# Altium PCB EST_MainV20.PcbDoc (part 4 of 8)
Units mm, origin at the board's own origin, x right, y up, seen from the top; angles counter-clockwise.
Board outline 69.72 x 115.32 mm, 2 copper layers (Top Layer, Bottom Layer); 330 components, 239 nets, 1066 pads, 416 vias.
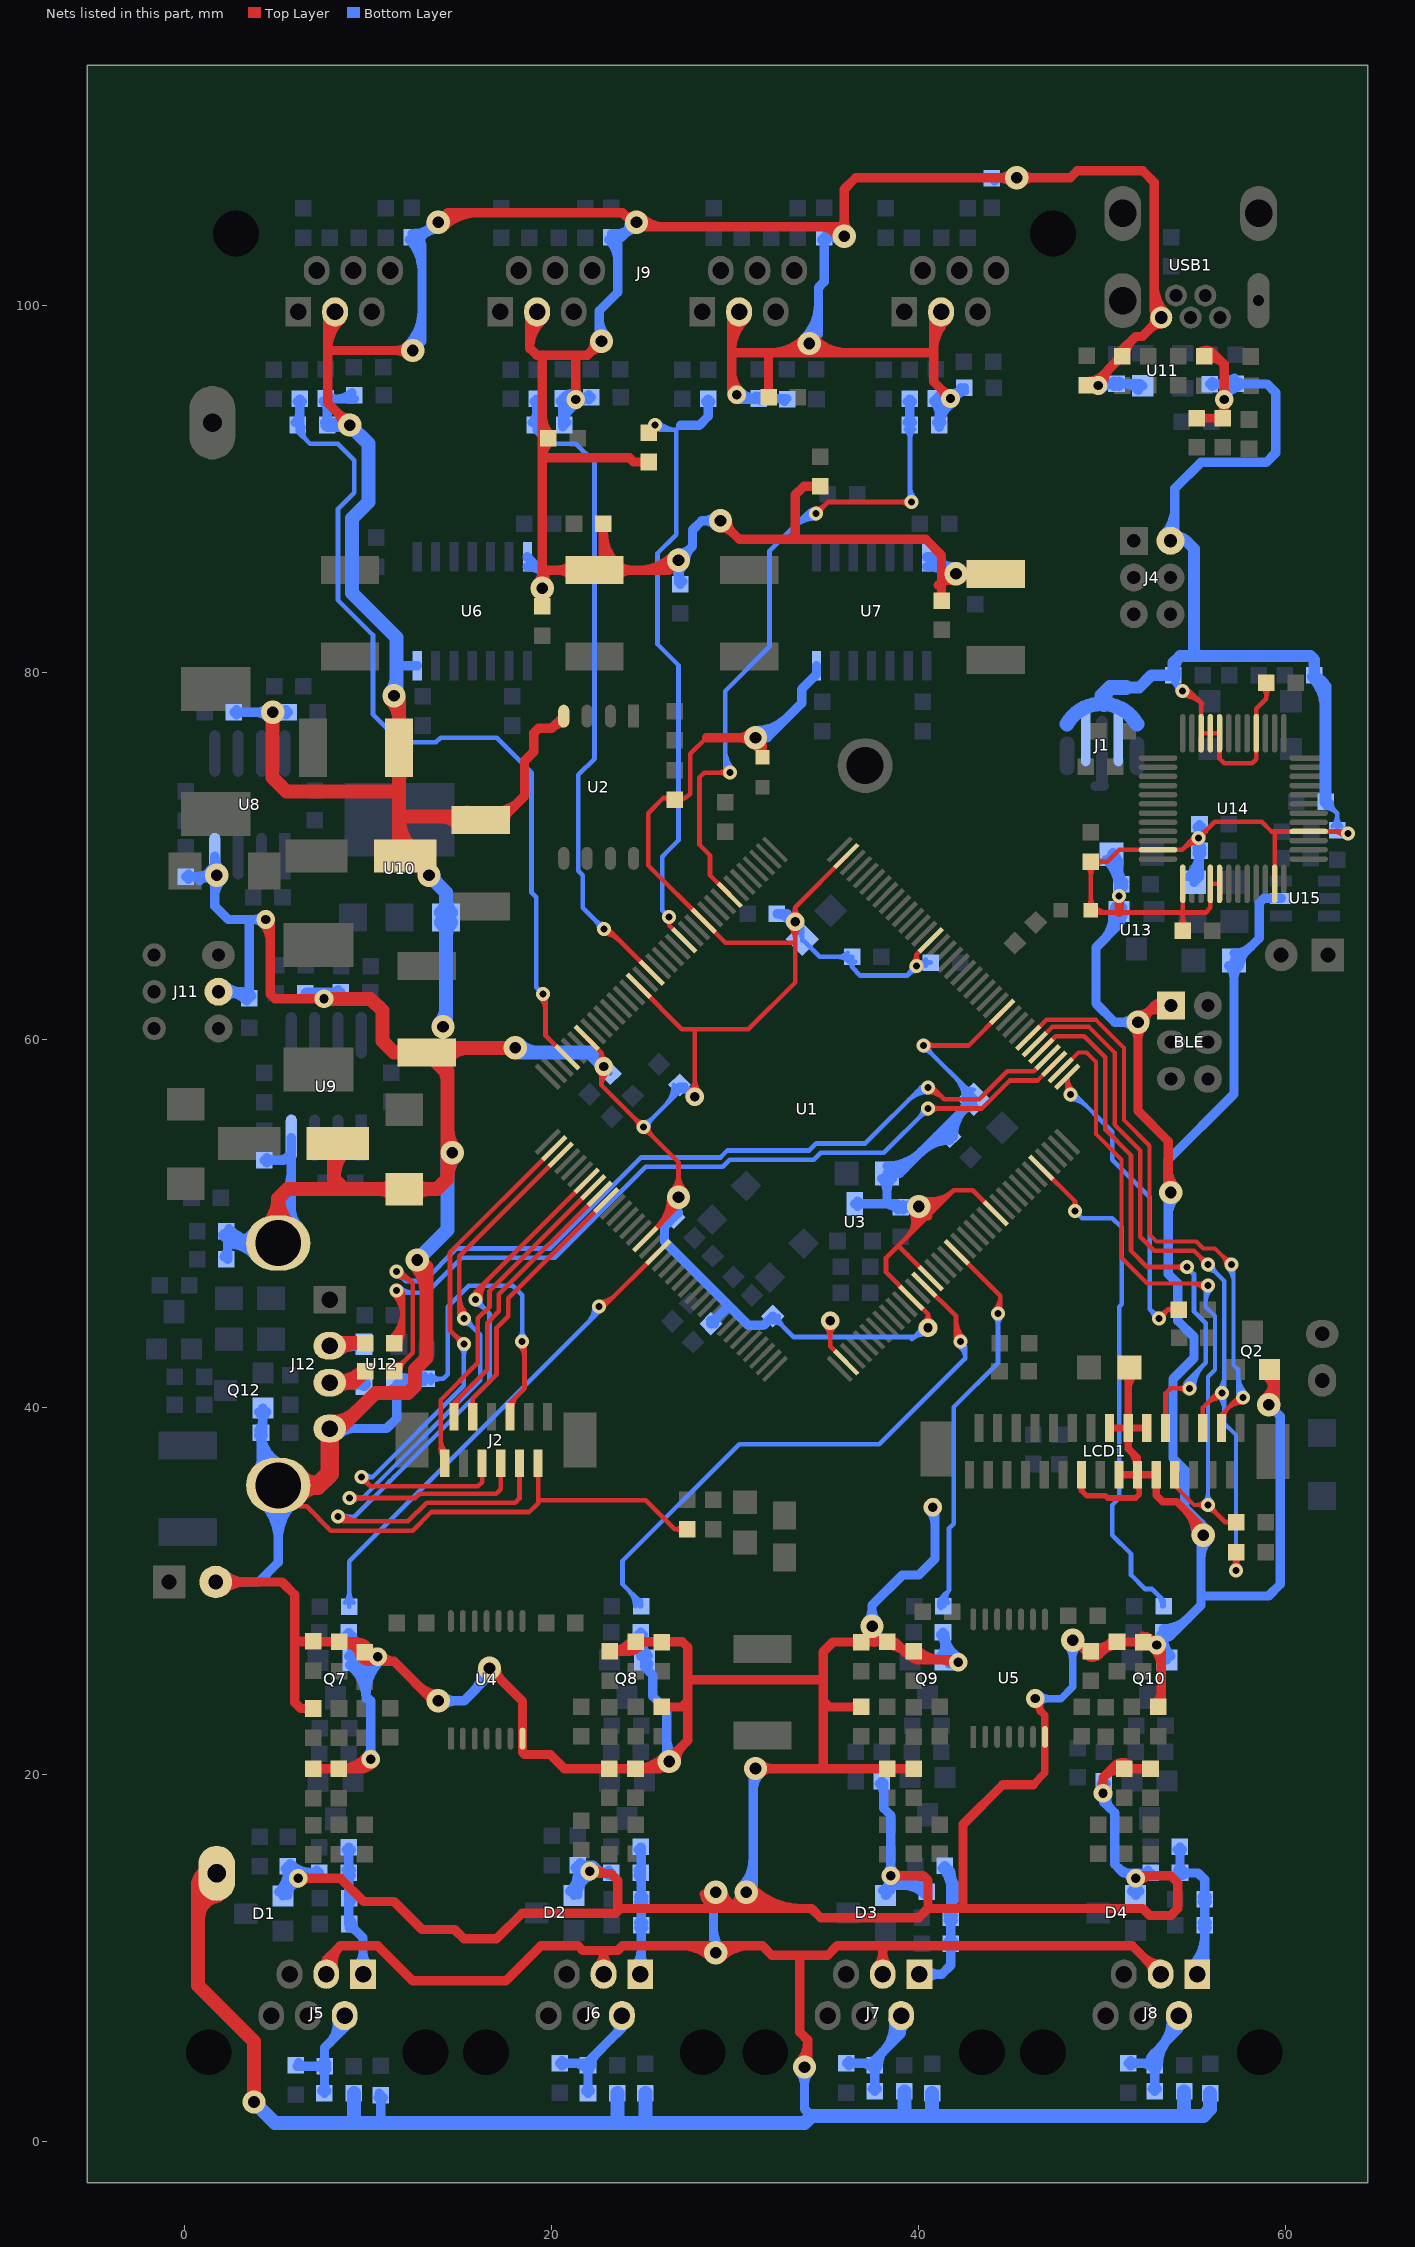
[diagram p4: the nets of this part, all layers, seen from the top]

## Via types
v1: diameter 0.762, hole 0.381, Top Layer to Bottom Layer, 258 vias
v2: diameter 1.27, hole 0.635, Top Layer to Bottom Layer, 91 vias
v3: diameter 1.016, hole 0.508, Top Layer to Bottom Layer, 66 vias
v4: diameter 1.524, hole 0.635, Top Layer to Bottom Layer, 1 vias

## Nets (pads, with @x,y where several pads share a name; then routed paths per layer and width w, separated by ;. In a path a pad name is that pad's centre, name@x,y a point inside that pad or via, vN(x,y) a via of type N, cw(c..) or ccw(c..) an arc to the next point about the centre after c; other vN are vias at no path point) (continued)
GND: (continued)
  Bottom Layer w0.508: R141.2@0.102,68.885 1.067,68.885 ; R141.2@0.241,68.746 cw(c0.575,68.412) 0.575,68.885 cw(c0.575,69.358) R141.2@0.241,69.024 ; 0.675,68.885 ccw(c0.675,70.064) U8.4@1.509,69.23 ; 0.838,68.656 cw(c1.637,67.858) U8.4@1.675,68.986 ; 1.042,68.885 cw(c1.042,68.225) 1.509,68.692 cw(c1.103,68.286) 1.676,68.286 ; 1.143,68.809 1.067,68.885 ; U8.4@1.666,69.484 cw(c1.691,69.459) U8.4@1.692,69.494 ; 1.676,67.796 cw(c2.943,67.796) v2@2.047,68.692 ; J10.2@1.727,30.48 4.064,30.48 5.13,31.546 J12.6@5.13,35.735 4.191,36.674 R160.1@4.191,38.608 ; J11.2@1.874,62.618 3.193,62.618 C69.1@3.552,62.258 3.552,66.425 ; R159.1@2.091,49.36 ccw(c3.213,50.482) 3.213,48.895 ; R158.1@2.173,48.195 ccw(c1.654,48.714) 2.388,48.714 ; J10.2@2.176,30.031 cw(c3.26,28.947) 3.26,30.48 cw(c3.26,32.013) J10.2@2.176,30.929 ; J11.2@2.212,62.618 cw(c2.212,60.918) C69.1@3.413,62.12 ; J11.2@2.234,62.258 cw(c3.101,61.391) 3.101,62.618 cw(c3.101,63.844) J11.2@2.234,62.977 ; R158.1@2.388,48.056 2.388,48.895 ; R159.1@2.388,49.58 2.388,48.895 ; R159.1@2.45,49.719 ccw(c4.439,51.708) J12.5@4.439,48.895 ; R139.1@2.718,77.825 2.722,77.83 v2(4.826,77.83) C57.2@5.693,77.83 ; R139.1@2.856,77.687 cw(c3.202,77.341) 3.202,77.83 ; R139.1@2.856,77.964 ccw(c3.18,78.288) 3.18,77.83 ; 3.372,48.895 ccw(c3.372,50.007) J12.5@4.279,49.362 ; C69.1@3.413,62.397 ccw(c3.079,62.732) 3.552,62.732 ccw(c4.025,62.732) C69.1@3.691,62.397 ; J12.5@3.865,49.657 cw(c2.388,50.707) 2.388,48.895 ; J12.5@3.903,48.162 ccw(c2.388,46.963) 2.388,48.895 ; J12.6@3.999,36.616 ccw(c3.535,37.079) 4.191,37.079 ; R160.1@4.052,38.47 cw(c3.718,38.135) 4.191,38.135 cw(c4.664,38.135) R160.1@4.33,38.47 ; R160.1@4.052,38.747 ccw(c3.473,39.327) 4.293,39.327 ; Q12.1@4.068,39.73 cw(c3.526,39.188) 4.293,39.188 cw(c5.059,39.188) Q12.1@4.517,39.73 ; 4.191,37.099 ccw(c5.434,37.099) J12.6@4.966,35.948 ; 4.191,37.854 ccw(c5.74,37.854) J12.6@5.158,36.419 ; J12.6@4.249,34.854 cw(c2.122,32.727) 5.13,32.727 cw(c8.138,32.727) J12.6@6.011,34.854 ; v3@4.265,66.368 ccw(c3.832,65.935) 3.832,66.548 ccw(c3.832,67.161) v3@4.265,66.728 ; Q12.1@4.293,39.954 4.293,38.71 R160.1@4.191,38.608 ; R142.2@4.369,53.442 5.436,53.442 5.842,53.848 U9.4@5.842,54.661 5.842,49.647 J12.5@5.13,48.935 5.09,48.895 2.388,48.895 ; v3@4.445,66.429 v3(4.445,66.548) 2.413,66.548 1.676,67.285 U8.4@1.676,70.002 ; J12.5@4.499,49.816 ccw(c1.256,53.058) 5.842,53.058 ; R142.2@4.508,53.303 cw(c4.842,52.969) 4.842,53.442 cw(c4.842,53.915) R142.2@4.508,53.58 ; v2@4.557,77.56 ccw(c3.906,76.91) 3.906,77.83 ccw(c3.906,78.749) v2@4.557,78.099 ; J12.6@4.608,35.213 cw(c3.348,33.953) 5.13,33.953 cw(c6.912,33.953) J12.6@5.652,35.213 ; J12.5@4.858,49.457 ccw(c2.483,51.832) 5.842,51.832 ; 5.107,53.442 ccw(c5.107,54.431) U9.4@5.806,53.732 ; v2@5.107,77.572 cw(c5.693,77.034) C57.2@5.693,77.83 ; v2@5.107,78.087 ccw(c5.693,78.625) C57.2@5.693,77.83 ; D1.1@5.165,13.603 ccw(c4.011,14.757) R45.1@5.644,14.757 ; J12.5@5.217,49.097 ccw(c3.709,50.605) 5.842,50.605 ; J12.6@5.349,36.889 cw(c6.046,38.608) R160.1@4.191,38.608 ; D1.1@5.39,13.379 5.644,13.632 R45.1@5.644,15.004 ; R45.1@5.505,14.866 cw(c5.17,14.531) 5.644,14.531 cw(c6.117,14.531) R45.1@5.782,14.866 ; C57.2@5.554,77.691 ccw(c5.22,77.356) 5.22,77.83 ccw(c5.22,78.303) C57.2@5.554,77.968 ; D1.1@5.644,13.428 cw(c6.318,13.428) v3@6.249,14.098 ; 5.644,13.991 cw(c6.26,13.991) v3@6.197,14.604 ; R45.1@5.782,15.143 ccw(c6.966,16.326) C15.2@6.966,14.653 ; 5.842,50.827 ccw(c7.273,50.827) J12.5@6.261,49.816 ; R45.1@5.995,14.653 C15.2@7.374,14.653 ccw(c7.374,13.436) v3@6.422,14.193 ; R140.1@6.604,62.534 R140.1@6.659,62.59 ; R140.1@6.743,62.396 cw(c7.21,61.928) 7.21,62.59 ; R140.1@6.909,62.534 R140.1@6.913,62.539 ; C15.2@7.236,14.514 ccw(c6.901,14.179) 6.901,14.653 ccw(c6.901,15.126) C15.2@7.236,14.791 ; v3@7.39,62.123 ccw(c6.659,61.785) R140.1@6.659,62.59 ; R102.1@7.583,94.781 cw(c7.056,94.254) 7.801,94.254 ; v3(7.62,62.23) v3@7.62,62.59 ; C41.1@7.662,93.615 ccw(c7.328,93.949) 7.801,93.949 ccw(c8.274,93.949) C41.1@7.939,93.615 ; C41.1@7.801,93.476 7.801,94.84 7.751,94.89 C43.1@9.268,94.89 ; v3@7.855,62.133 cw(c8.538,61.851) C58.2@8.538,62.59 v3@7.62,62.59 ; R102.1@7.86,95.058 ccw(c8.265,95.464) 8.265,94.89 ; J12.4@7.93,38.835 11.022,38.835 11.582,39.395 U12.1@11.582,41.25 11.872,41.539 C68.2@13.204,41.539 ; 8.304,94.89 ccw(c8.304,96.057) C43.1@9.129,95.232 ; C58.2@8.399,62.451 ccw(c8.064,62.116) 8.064,62.59 ccw(c8.064,63.063) C58.2@8.399,62.728 ; J12.4@8.42,38.484 cw(c9.266,37.637) 9.266,38.835 cw(c9.266,40.032) J12.4@8.42,39.185 ; R41.1@8.833,27.591 cw(c7.946,26.704) Q7.1@9.2,26.704 ; R41.1@8.971,27.729 9.2,27.501 Q7.1@9.2,26.206 9.906,26.206 ; Q7.1@8.975,26.43 ccw(c8.433,26.972) 9.2,26.972 ccw(c9.966,26.972) 9.424,26.43 ccw(c9.966,26.972) 9.966,26.206 ccw(c9.966,25.439) Q7.1@9.424,25.981 ; Q7.1@9.007,25.954 cw(c7.613,24.133) 9.906,24.133 ; Q7.1@9.316,26.357 cw(c8.401,25.162) 9.906,25.162 ; Q7.1@9.42,26.206 ccw(c9.42,27.537) 10.361,26.596 ccw(c11.461,25.496) 9.906,25.496 ; Q7.1@9.625,26.76 cw(c9.188,26.19) 9.906,26.19 ; 9.906,24.27 cw(c12.687,24.27) v3@10.721,26.236 ; v3@9.98,21.008 ccw(c9.547,21.441) 10.16,21.441 ccw(c10.773,21.441) v3@10.34,21.008 ; v3(10.16,20.828) 10.16,24.003 9.906,24.257 9.906,26.206 ; C19.2@10.581,2.397 cw(c10.247,2.063) 10.72,2.063 cw(c11.193,2.063) C19.2@10.859,2.397 ; C19.2@10.614,2.642 C19.2@10.72,2.536 10.72,1.778 ; 10.668,1.016 10.72,1.068 10.72,1.778 ; 10.72,1.472 10.72,1.778 ; v3@10.751,26.206 9.906,26.206 ; U12.1@11.349,41.016 cw(c10.785,40.452) 11.582,40.452 cw(c12.38,40.452) 11.816,41.016 cw(c13.078,39.754) C68.2@13.078,41.539 ; 11.557,80.391 11.582,80.366 U6.7@12.694,80.366 ; v2@12.177,97.805 ccw(c10.3,99.682) 12.954,99.682 ; C45.1@12.261,103.567 cw(c10.587,101.893) 12.954,101.893 ; C45.1@12.391,103.509 cw(c12.365,102.921) 12.954,102.921 ; C45.1@12.399,103.509 cw(c12.399,103.036) 12.734,103.371 cw(c13.068,103.705) C45.1@12.595,103.705 ; C45.1@12.42,103.9 ccw(c12.558,105.171) 13.462,104.267 12.9,103.705 12.9,103.204 12.954,103.15 12.954,98.044 v2(12.446,97.536) ; v2@12.536,97.446 ccw(c11.526,98.456) 12.954,98.456 ; C45.1@12.62,103.926 cw(c11.813,103.119) 12.954,103.119 ; 12.976,103.781 cw(c13.843,102.914) v2@13.843,104.14 ; C68.2@13.065,41.4 ccw(c12.731,41.066) 12.731,41.539 ccw(c12.731,42.012) C68.2@13.065,41.678 ; 13.282,104.087 ccw(c12.849,104.521) v2@13.462,104.521 ; v2(13.843,24.003) 15.24,24.003 16.637,25.4 v2(16.637,25.781) ; v2@14.112,23.734 cw(c14.763,23.083) 14.763,24.003 cw(c14.763,24.923) v2@14.112,24.272 ; 15.717,24.48 ccw(c14.416,25.781) v2@16.256,25.781 ; U6.14@18.694,85.76 cw(c18.694,84.441) 19.626,85.374 ; U6.14@18.694,86.268 cw(c18.694,86.176) U6.14@18.759,86.241 ; U6.14@18.694,86.306 19.507,85.493 ; v2@19.238,84.855 ccw(c18.618,85.493) 19.507,85.493 ; v2(19.503,84.582) 19.507,84.586 19.507,85.493 ; 19.507,85.492 ccw(c20.413,85.492) v2@19.773,84.851 ; R104.1@20.486,94.781 cw(c20.151,94.447) 20.624,94.447 cw(c21.098,94.447) 20.763,94.781 cw(c21.272,94.272) v3@21.272,94.992 ; C42.1@20.624,93.375 cw(c22.009,93.375) v3@21.44,94.637 ; 20.624,94.141 ccw(c21.369,94.141) C42.1@20.843,93.615 ; 20.624,94.161 cw(c21.655,94.161) v3@21.232,95.101 ; R104.1@20.699,94.994 cw(c21.142,94.552) v3@21.469,95.086 ; C42.1@20.704,93.476 20.624,93.556 R104.1@20.624,94.92 R104.1@20.697,94.992 ; R104.1@20.725,95.02 cw(c21.136,94.609) v3@21.491,95.07 ; D2.1@21.01,13.636 ccw(c19.978,14.667) R46.1@21.437,14.667 ; v3@21.114,94.746 ccw(c20.697,94.515) R104.1@20.697,94.992 ; D2.1@21.234,13.411 21.437,13.614 R46.1@21.437,15.062 ; R46.1@21.299,14.924 cw(c20.964,14.589) 21.437,14.589 cw(c21.91,14.589) 21.576,14.924 cw(c21.91,14.589) 21.91,15.062 cw(c21.91,15.535) R46.1@21.576,15.201 ; D2.1@21.437,13.433 cw(c22.562,13.433) v3@22.184,14.493 ; 21.437,14.155 cw(c22.305,14.155) v3@22.012,14.971 ; v3@21.527,94.701 cw(c22.171,94.132) C44.1@22.171,94.992 R104.1@20.697,94.992 ; R46.1@21.846,14.701 ccw(c21.437,14.65) R46.1@21.437,15.062 ; C44.1@22.033,94.853 ccw(c21.698,94.519) 21.698,94.992 ccw(c21.698,95.465) C44.1@22.033,95.131 ; v3@22.278,14.912 ccw(c22.947,15.581) C16.2@22.947,14.634 ; v3@22.559,14.779 ccw(c22.848,15.068) C16.2@23.133,14.775 ; v2@22.606,98.171 22.606,99.695 23.622,100.711 C46.1@23.622,103.354 ; 22.606,99.27 ccw(c23.959,99.27) v2@23.002,98.313 ; C16.2@23.131,14.496 ccw(c22.796,14.161) 22.796,14.634 ccw(c22.796,15.108) C16.2@23.131,14.773 ; C46.1@23.132,103.567 cw(c21.948,102.383) 23.622,102.383 ; C16.2@23.27,14.634 22.704,14.634 22.276,15.062 R46.1@21.437,15.062 ; C46.1@23.27,103.705 23.822,103.705 24.384,104.267 cw(c23.469,105.182) C46.1@23.296,103.899 ; v2@24.257,104.521 cw(c23.337,104.521) 23.988,103.871 cw(c24.638,103.22) v2@24.638,104.14 ; R42.1@24.728,27.598 cw(c24.393,27.263) 24.867,27.263 cw(c25.34,27.263) R42.1@25.005,27.598 ; Q8.1@24.867,26.441 R42.1@24.867,27.736 ; R42.1@24.867,27.495 ccw(c26.327,27.495) Q8.1@25.294,26.463 ; Q8.1@25.07,26.238 25.07,25.857 25.527,25.4 25.527,24.257 26.289,23.495 26.289,21.209 v2@26.543,20.955 ; Q8.1@25.315,26.036 ccw(c25.571,25.825) 25.336,25.591 ; 26.289,21.927 ccw(c27.642,21.927) v2@26.685,20.97 ; v2@26.655,85.837 cw(c26.004,85.186) 26.924,85.186 cw(c27.844,85.186) v2@27.193,85.837 ; C6.1@26.924,50.597 C6.1@26.667,50.34 26.162,49.835 26.162,49.022 30.734,44.45 31.547,44.45 C7.1@32.058,44.961 ; v2@26.924,85.522 ccw(c27.73,85.522) C40.1@27.16,84.952 ; v2@26.924,86.487 ccw(c26.924,87.407) 27.574,86.756 ccw(c28.225,86.106) v2@27.305,86.106 ; C40.1@27.022,84.814 26.924,84.911 v2(26.924,86.106) 27.686,86.868 27.686,87.757 28.194,88.265 v2(29.21,88.265) ; C8.1@28.686,44.537 29.644,45.495 ; C8.1@28.686,44.733 ccw(c28.686,45.206) 29.021,44.872 ccw(c29.355,44.537) C8.1@28.882,44.537 ; v2@28.829,10.287 v2@28.829,13.589 ; 28.829,11.513 ccw(c30.182,11.513) v2@29.225,10.556 ; 28.829,12.363 cw(c30.182,12.363) v2@29.225,13.32 ; v2@28.941,87.996 ccw(c28.29,87.345) 28.29,88.265 ccw(c28.29,89.185) v2@28.941,88.534 ; v3@30.099,94.869 31.292,94.869 cw(c31.292,96.271) v3@30.282,95.299 ; v2@30.338,13.858 ccw(c28.767,15.429) 30.988,15.429 ; v2(30.607,13.589) 30.988,13.97 v2@30.988,19.939 ; 30.697,94.869 ccw(c30.697,95.516) R120.1@31.154,95.058 ; v2@30.697,13.499 ccw(c29.994,14.202) 30.988,14.202 ; 30.988,19.094 cw(c32.341,19.094) v2@31.384,20.051 ; v2@31.115,76.327 ccw(c31.115,77.553) 31.982,76.686 ; v2(31.115,76.454) 31.75,76.454 33.63,78.334 33.63,79.096 34.437,79.903 U7.7@34.437,80.366 ; v2@31.115,76.835 ccw(c31.115,79.288) 32.849,77.553 ; R120.1@31.292,94.92 C51.1@32.81,94.92 ; R120.1@31.431,94.781 cw(c31.766,94.447) 31.766,94.92 cw(c31.766,95.393) R120.1@31.431,95.058 ; 32.295,94.92 cw(c32.295,94.346) C51.1@32.701,94.752 ; v3@33.036,66.334 ccw(c32.286,66.059) C61.1@32.286,66.857 32.838,66.857 v3(33.274,66.421) ; v2@33.513,3.795 cw(c32.862,3.144) 33.782,3.144 cw(c34.702,3.144) v2@34.051,3.795 ; v2@33.767,98.186 ccw(c31.89,100.063) 34.544,100.063 ; v2@33.782,3.81 33.782,1.778 34.163,1.397 ; v2(34.036,97.917) 34.544,98.425 34.544,100.965 34.853,101.274 C53.1@34.853,103.705 ; v2@34.126,97.827 ccw(c33.116,98.837) 34.544,98.837 ; C53.1@34.714,103.567 cw(c34.38,103.232) 34.853,103.232 cw(c35.326,103.232) 34.991,103.567 cw(c35.456,103.102) v2@35.456,103.759 ; C53.1@34.907,103.759 v2(35.941,103.759) ; v2@35.672,103.49 ccw(c35.021,102.839) 35.021,103.759 ccw(c35.021,104.679) v2@35.672,104.028 ; U3.2@36.525,51.079 38.354,51.079 ; U3.2@36.669,50.936 cw(c37.016,50.589) 37.016,51.079 cw(c37.016,51.57) U3.2@36.669,51.223 ; v2@37.196,28.336 ccw(c36.545,28.987) 37.465,28.987 ccw(c38.385,28.987) v2@37.734,28.336 ; v2(37.465,28.067) v2@37.465,28.321 ; v2@37.592,28.194 v2@37.465,28.321 ; R47.1@37.859,19.496 cw(c37.279,18.915) 38.1,18.915 ; C12.1@37.996,52.449 cw(c37.32,51.773) 38.276,51.773 cw(c39.232,51.773) C12.1@38.556,52.449 ; R47.1@37.998,19.634 38.1,19.532 38.1,18.161 38.481,17.78 v3(38.481,14.478) ; D3.1@38.036,13.682 ccw(c37.547,14.478) v3(38.481,14.478) ; 38.051,51.079 cw(c38.051,49.912) R9.1@38.876,50.738 ; D3.1@38.202,13.411 38.481,13.691 v3(38.481,14.478) ; C12.1@38.276,52.617 ccw(c38.276,54.016) 39.266,53.027 ; C12.1@38.276,53.125 ccw(c38.276,55.751) 40.133,53.894 ; v3@38.284,14.317 ccw(c39.017,14.916) 39.017,13.97 ; v3@38.301,14.298 cw(c37.868,13.865) 38.481,13.865 cw(c39.094,13.865) v3@38.661,14.298 ; v3@38.301,14.658 ccw(c37.868,15.091) 38.481,15.091 ccw(c39.094,15.091) v3@38.661,14.658 ; D3.1@38.601,13.97 C17.2@40.088,13.97 ; v3@38.678,14.639 ccw(c40.088,15.792) C17.2@40.088,13.97 ; 39.118,13.97 cw(c39.118,12.296) C17.2@40.301,13.48 ; R9.1@39.153,50.738 cw(c39.488,50.403) 39.488,50.876 cw(c39.488,51.349) R9.1@39.153,51.015 ; R9.1@39.208,50.876 cw(c39.208,50.13) v2@39.736,50.658 ; v2@39.726,51.186 cw(c39.015,51.846) R9.1@39.015,50.876 ; v2@39.954,50.876 R9.1@39.015,50.876 ; 40.118,53.878 cw(c41.696,52.3) C85.2@41.696,54.532 ; C17.2@40.19,13.868 C17.2@40.44,13.618 C17.2@40.088,13.97 ; U7.14@40.437,85.76 cw(c40.437,83.574) v2@41.982,85.12 ; U7.14@40.437,86.268 cw(c40.437,85.309) 41.115,85.987 ; U7.14@40.437,86.306 40.796,86.306 v2@41.732,85.369 ; v3@40.587,34.364 cw(c39.847,33.624) 40.894,33.624 ; R122.1@40.806,94.781 cw(c40.034,94.009) 41.126,94.009 ; v3@40.894,34.798 40.894,31.75 40.005,30.861 39.116,30.861 37.465,29.21 v2@37.465,28.321 ; 40.948,86.153 ccw(c41.929,87.133) v2@42.014,85.75 ; 40.985,54.746 cw(c41.696,54.035) C85.2@41.696,55.04 ; C50.1@40.987,93.615 ccw(c40.652,93.949) 41.126,93.949 ccw(c41.599,93.949) C50.1@41.264,93.615 ; R122.1@41.083,94.781 cw(c41.418,94.447) 41.418,94.92 cw(c41.418,95.393) R122.1@41.083,95.058 ; C50.1@41.126,93.354 cw(c42.727,93.354) v3@41.868,94.705 ; C50.1@41.126,93.476 41.126,94.739 R122.1@40.944,94.92 v3(41.732,94.92) 41.911,94.92 C52.1@42.491,95.5 ; 41.126,94.278 cw(c42.14,94.278) v3@41.596,95.134 ; R43.1@41.187,27.598 cw(c40.607,27.018) 41.427,27.018 ; Q9.1@41.203,26.463 ccw(c40.661,27.005) 41.427,27.005 ccw(c42.194,27.005) 41.652,26.463 ccw(c42.194,27.005) 42.194,26.238 ccw(c42.194,25.472) Q9.1@41.652,26.014 ; R43.1@41.326,27.736 R43.1@41.427,27.635 ; C85.2@41.384,54.728 cw(c42.389,54.728) 41.678,55.439 ; 41.427,26.853 ccw(c42.493,26.853) v3@42.061,25.879 ; v3@41.553,94.74 ccw(c41.119,94.307) 41.119,94.92 ccw(c41.119,95.533) v3@41.553,95.099 ; v3@41.732,95.174 ccw(c41.732,96.219) C52.1@42.471,95.48 ; C85.2@41.892,54.728 cw(c44.124,54.728) C9.2@42.546,56.306 ; Q9.1@41.957,25.964 ccw(c41.427,25.59) Q9.1@41.427,26.238 ; v2(42.037,85.369) 43.027,85.369 C48.1@43.074,85.322 ; v3@42.267,26.343 cw(c42.84,27.635) R43.1@41.427,27.635 ; v3@42.291,26.238 Q9.1@41.427,26.238 ; C52.1@42.295,95.5 cw(c41.822,95.5) 42.157,95.165 cw(c42.491,94.831) C52.1@42.491,95.304 ; v2@42.306,85.1 cw(c42.957,84.45) 42.957,85.369 cw(c42.957,86.289) v2@42.306,85.639 ; v2@42.486,85.369 cw(c42.486,84.733) C48.1@42.936,85.183 ; C9.2@42.608,56.765 cw(c41.652,56.765) 42.328,56.089 cw(c43.004,55.413) C9.2@43.004,56.369 ; C9.2@43.004,56.765 38.968,52.729 C12.1@38.276,52.729 38.276,51.157 38.354,51.079 ; C54.1@44.011,106.934 v2(45.339,106.934) ; C54.1@44.127,106.773 cw(c44.516,106.384) 44.516,106.934 ; v2@45.07,106.665 ccw(c44.419,106.014) 44.419,106.934 ccw(c44.419,107.854) v2@45.07,107.203 ; v3@49.873,19.166 ccw(c49.473,19.634) R48.1@50.088,19.634 50.088,18.492 50.673,17.907 50.673,15.113 51.152,14.634 ; R48.1@49.95,19.496 cw(c49.615,19.161) 50.088,19.161 cw(c50.562,19.161) R48.1@50.227,19.496 ; v3@49.964,95.451 cw(c50.635,94.78) R149.1@50.635,95.73 ; 50.013,65.38 ccw(c48.612,66.78) U13.2@50.585,66.952 ; v3@50.165,95.73 52.073,95.73 U11.1@52.197,95.606 ; C73.2@50.224,69.822 cw(c48.587,68.186) C74.1@50.902,68.186 ; v3@50.278,18.892 ccw(c50.985,18.651) 50.457,18.123 ; 50.294,95.73 ccw(c50.294,96.213) R149.1@50.636,95.871 ; 50.308,95.73 cw(c50.308,95.267) R149.1@50.636,95.594 ; C73.2@50.504,70.102 50.902,69.704 v1(50.902,67.818) U13.2@50.902,66.98 50.902,66.269 ; C73.2@50.583,70.182 cw(c49.813,69.412) 50.902,69.412 ; U13.2@50.677,67.204 ccw(c50.135,67.746) 50.902,67.746 ccw(c51.668,67.746) U13.2@51.126,67.204 ; U13.2@50.69,66.743 cw(c50.264,66.269) 50.902,66.269 ; 50.783,66.15 ccw(c50.03,66.904) U13.2@51.091,66.996 ; 50.865,14.921 ccw(c51.652,15.708) v3@51.788,14.603 ; v1@50.902,67.702 cw(c51.798,67.702) C74.1@51.164,68.336 ; 50.902,69.247 ccw(c51.798,69.247) C74.1@51.164,68.613 ; R149.1@50.913,95.594 cw(c51.24,95.267) 51.24,95.73 ; R149.1@50.913,95.871 ccw(c51.255,96.213) 51.255,95.73 ; R149.1@51.1,95.73 cw(c51.1,94.509) U11.1@51.964,95.372 ; U13.2@51.114,66.743 ccw(c51.539,66.269) 50.902,66.269 ; v3@51.571,14.297 ccw(c51.152,14.205) 51.152,14.634 ; D4.1@51.591,13.636 ccw(c51.042,14.185) v3@51.819,14.185 ; v3@51.64,14.171 cw(c51.206,13.738) 51.819,13.738 cw(c52.432,13.738) v3@51.999,14.171 ; v2@51.674,60.691 ccw(c51.023,60.04) 51.023,60.96 ccw(c51.023,61.88) v2@51.674,61.229 ; D4.1@51.816,13.411 51.819,13.414 v3(51.819,14.351) v3@51.819,14.634 ; v3@51.819,14.17 ccw(c52.575,14.17) D4.1@52.041,13.636 ; v2(51.943,60.96) 50.673,60.96 49.657,61.976 49.657,65.024 50.902,66.269 ; v3@52.053,14.252 cw(c52.632,14.005) C18.2@52.632,14.634 v3@51.819,14.634 ; C18.2@52.493,14.496 ccw(c52.159,14.161) 52.159,14.634 ccw(c52.159,15.108) C18.2@52.493,14.773 ; R44.1@52.929,27.303 ccw(c52.879,27.736) R44.1@53.315,27.736 ; R44.1@53.176,27.598 cw(c52.841,27.263) 53.315,27.263 cw(c53.788,27.263) 53.453,27.598 cw(c53.788,27.263) 53.788,27.736 cw(c53.788,28.21) R44.1@53.453,27.875 ; v3@53.207,26.996 ccw(c53.874,26.848) Q10.1@53.391,26.365 ; R44.1@53.315,27.424 ccw(c53.315,28.081) 53.779,27.617 ; R44.1@53.315,27.495 ccw(c54.775,27.495) Q10.1@53.742,26.463 ; R44.1@53.315,27.932 ccw(c53.315,29.815) 54.646,28.484 ; J4.2@53.355,87.532 ccw(c51.92,88.967) 53.95,88.967 ; Q10.1@53.518,26.238 53.315,26.441 R44.1@53.315,27.736 ; 53.594,50.463 cw(c54.947,50.463) v2@53.99,51.42 ; 53.594,52.915 ccw(c54.947,52.915) v2@53.99,51.958 ; J4.2@53.95,87.173 53.95,90.018 55.372,91.44 56.134,91.44 ; 54.489,34.538 cw(c52.972,33.02) v2@55.118,33.02 ; C72.1@54.712,68.862 ccw(c53.311,70.263) C79.1@55.293,70.263 ; C72.1@54.992,68.582 55.293,68.882 C79.1@55.293,70.303 C80.1@55.293,71.726 ; C79.1@55.154,70.165 cw(c54.82,69.83) 55.293,69.83 cw(c55.766,69.83) C79.1@55.431,70.165 ; C79.1@55.154,70.442 ccw(c54.82,70.776) 55.293,70.776 ccw(c55.766,70.776) C79.1@55.431,70.442 ; C80.1@55.154,71.587 cw(c54.82,71.252) 55.293,71.252 cw(c55.766,71.252) C80.1@55.431,71.587 ; v1@55.155,70.903 cw(c54.823,70.571) C79.1@55.293,70.571 ; v1@55.155,71.083 ccw(c54.823,71.415) C80.1@55.293,71.415 ; 55.357,33.67 cw(c54.706,33.02) v2@55.626,33.02 ; 55.372,31.794 cw(c56.725,31.794) v2@55.768,32.751 ; 55.753,91.44 56.134,91.44 ; R143.2@55.855,95.707 55.858,95.71 56.642,95.71 ; R143.2@55.994,95.569 cw(c56.335,95.227) 56.335,95.71 ; R143.2@55.994,95.846 ccw(c56.321,96.173) 56.321,95.71 ; v3@56.462,95.049 ccw(c56.029,95.482) 56.642,95.482 ccw(c57.255,95.482) v3@56.822,95.049 ; v3@56.642,94.659 cw(c57.528,94.659) C63.2@57.319,95.52 ; v3(56.642,94.869) 56.642,95.71 ; v3@56.642,95.305 cw(c57.371,95.305) C63.2@57.199,96.014 ; C71.1@56.894,64.031 cw(c56.218,63.355) 57.174,63.355 cw(c58.13,63.355) C71.1@57.454,64.031 ; C71.1@57.174,64.707 ccw(c57.174,66.031) 58.11,65.095 ; C63.2@57.412,95.572 cw(c57.746,95.237) 57.746,95.71 cw(c57.746,96.184) C63.2@57.412,95.849 ; C71.1@57.57,64.311 cw(c58.159,64.311) C71.1@57.742,64.727 ; v2(59.055,40.132) 59.69,39.497 59.69,30.353 59.055,29.718 55.372,29.718 ; U15.2@59.741,67.701 58.811,67.701 58.547,67.437 58.547,65.532 57.326,64.311 C71.1@57.174,64.311 57.174,57.829 57.174,57.047 53.594,53.467 53.594,47.244 54.102,46.736 54.102,44.704 54.991,43.815 54.991,42.672 53.848,41.529 53.848,37.211 54.483,36.576 54.483,34.544 55.499,33.528 v2(55.499,33.02) 55.372,32.893 55.372,29.718 ; 1.067,68.885 1.676,69.494 U8.4@1.676,70.002 ; U8.4@1.509,69.23 ccw(c1.103,69.636) 1.676,69.636 cw(c1.103,69.636) U8.4@1.509,69.23 ; U8.4@1.676,70.002 ccw(c2.66,70.002) 2.024,69.252 cw(c2.66,70.002) U8.4@1.676,70.002 ; R159.1@2.173,49.442 cw(c1.654,48.923) 2.388,48.923 ; R159.1@2.173,49.442 cw(c1.654,48.923) 2.388,48.923 ; R159.1@2.173,49.442 cw(c1.654,48.923) 2.388,48.923 ; R140.1@6.659,62.59 v3@7.62,62.59 ; 9.906,26.206 ccw(c9.906,26.618) 10.299,26.493 cw(c9.906,26.618) 9.906,26.206 ; 9.906,26.206 cw(c9.906,26.832) 9.438,26.416 ccw(c9.906,26.832) 9.906,26.206 ; 9.906,26.206 ccw(c9.906,25.58) 9.438,25.995 cw(c9.906,25.58) 9.906,26.206 ; 38.354,51.079 cw(c38.354,50.529) 38.841,50.785 ccw(c38.354,50.529) 38.354,51.079 ; 38.354,51.079 38.812,51.079 R9.1@39.015,50.876 ; Q9.1@41.427,26.238 R43.1@41.427,27.635 ; 51.152,14.634 v3@51.819,14.634 ; R44.1@53.315,27.736 53.898,27.736 55.372,29.21 55.372,29.718 ; 56.134,91.44 58.928,91.44 59.436,91.948 59.436,95.25 58.976,95.71 C63.2@57.273,95.71 56.642,95.71 ; 56.8,95.71 cw(c56.8,95.237) C63.2@57.134,95.572 ; 56.8,95.71 ccw(c56.8,96.184) C63.2@57.134,95.849 ; 56.8,95.71 cw(c56.8,95.237) C63.2@57.134,95.572 ; 56.8,95.71 ccw(c56.8,96.184) C63.2@57.134,95.849 ; 56.8,95.71 cw(c56.8,95.237) C63.2@57.134,95.572 ; 56.8,95.71 ccw(c56.8,96.184) C63.2@57.134,95.849 ; v1@50.902,67.806 cw(c51.563,67.806) 51.148,68.322 ccw(c51.563,67.806) v1@50.902,67.806
  Bottom Layer w0.635: J1.2@49.987,78.257 J1.2@49.987,78.297 ; 51.308,79.182 52.004,79.182 52.676,79.854 C76.1@53.87,79.854 53.87,80.54 54.229,80.899 ; J4.2@53.645,87.173 53.95,87.173 54.559,87.173 54.991,86.741 54.991,81.153 55.245,80.899 ; J4.2@53.665,87.357 cw(c53.925,86.386) 54.635,87.097 ; C76.1@53.996,79.896 cw(c54.918,80.21) 54.229,80.899 ; C77.1@61.454,79.768 cw(c59.756,78.07) 62.157,78.07 ; C77.1@61.527,79.731 cw(c61.418,79) 62.157,79 ; C75.1@62.157,72.953 62.157,79.252 C77.1@61.547,79.862 61.547,80.693 61.341,80.899 55.245,80.899 ; 54.229,80.899 55.245,80.899
  Bottom Layer w0.762: v2@4.191,1.778 4.953,1.016 10.668,1.016 ; C41.1@7.801,93.476 9.013,93.476 v2(9.017,93.472) 10.033,92.456 10.033,89.281 9.144,88.392 9.144,84.328 11.557,81.915 11.557,80.391 v2@11.557,78.74 ; 9.245,1.042 R57.2@9.245,2.642 ; 10.16,1.016 10.668,1.016 ; v2@11.25,78.92 ccw(c10.51,79.66) 11.557,79.66 ; v2(12.7,48.006) 14.351,49.657 14.351,53.594 v2(14.605,53.848) ; v2(13.335,68.961) 14.275,68.021 U10.1@14.275,66.65 v2@14.275,61.036 ; v2@13.917,60.886 ccw(c13.055,61.748) 14.275,61.748 ; U10.1@14.005,66.38 cw(c13.355,65.73) 14.275,65.73 cw(c15.195,65.73) U10.1@14.544,66.38 ; U10.1@14.005,66.919 ccw(c13.355,67.569) 14.275,67.569 ccw(c15.195,67.569) U10.1@14.544,66.919 ; 14.351,52.622 cw(c15.831,52.622) v2@14.785,53.668 ; v2(18.034,59.563) 18.288,59.309 22.098,59.309 v3@22.733,58.674 ; v2@18.214,59.743 ccw(c19.26,60.789) 19.26,59.309 ; 23.596,1.498 R58.2@23.596,2.642 ; C20.2@25.117,2.645 25.117,1.045 25.146,1.016 ; 39.217,1.423 R59.2@39.217,2.744 ; 40.738,1.426 C21.2@40.738,2.645 ; 54.457,1.55 R60.2@54.457,2.744 ; C22.2@55.876,2.645 55.876,1.774 55.499,1.397 34.163,1.397 33.782,1.016 25.146,1.016 ; 10.668,1.016 25.146,1.016
  Bottom Layer w0.8: 48.074,77.197 cw(c49.98,76.097) J1.2@49.987,78.297 ; J1.2@50.096,78.239 cw(c51.22,78.382) 50.419,79.182 ; 51.308,79.182 50.419,79.182 ; 51.885,77.197 ccw(c49.98,76.097) J1.2@49.987,78.297 ; J1.2@49.987,78.297 49.987,78.75 50.419,79.182
  other v2: 33.782,4.064 28.956,10.287 28.956,13.589 26.416,20.701 53.721,51.689 14.097,60.706 1.778,68.961 11.43,78.74 22.733,98.044 24.638,104.521
  other v3: 22.098,14.732 50.038,18.973 46.355,24.13 42.164,26.111 10.541,26.416 52.959,27.051 40.767,34.544 40.513,44.323 30.099,95.123 49.784,95.631
HD+: J12.3 R163.2 U12.2 | length 8.9
  Top Layer w0.762: J12.3@8.048,41.453 J12.3@7.93,41.335 9.229,41.335 R163.2@9.855,41.961 ; J12.3@8.176,41.335 ccw(c8.176,43.64) R163.2@9.807,42.01 ; J12.3@8.33,41.074 cw(c8.96,40.444) 8.96,41.335 cw(c8.96,42.226) J12.3@8.33,41.596
  Bottom Layer w0.762: J12.3@7.93,41.335 9.719,41.335 U12.2@9.804,41.25 ; J12.3@8.33,41.074 cw(c8.96,40.444) 8.96,41.335 cw(c8.96,42.226) J12.3@8.33,41.596
HD-: J12.2 R162.2 U12.3 | length 6
  Top Layer w0.762: J12.2@7.93,43.335 J12.2@8.084,43.18 ; J12.2@8.084,43.485 R162.2@9.855,43.485 ; J12.2@8.33,43.074 cw(c9.323,42.08) 9.323,43.485
  Bottom Layer w0.762: J12.2@7.93,43.335 8.029,43.434 U12.3@9.804,43.434 ; J12.2@8.33,43.074 cw(c9.2,42.204) 9.2,43.434
HOSTDM: R162.1 U1.75 | length 55.3
  Top Layer w0.254: R162.1@11.227,43.714 ccw(c9.511,45.43) 11.938,45.43 ; v1@11.377,46.175 cw(c10.024,44.822) 11.938,44.822 ; R162.1@11.407,43.534 ccw(c10.124,44.817) 11.938,44.817 ; R162.1@11.455,43.485 11.938,43.968 ; R162.1@11.487,43.807 ccw(c11.542,44.363) 11.938,43.968 ; R162.1@11.586,43.354 ccw(c10.737,44.204) 11.938,44.204 ; v1@11.737,46.535 cw(c11.25,46.048) 11.938,46.048 ; R162.1@11.777,43.517 cw(c12.334,43.572) 11.938,43.968 ; 11.938,45.435 ccw(c10.637,45.435) v1(11.557,46.355) 11.811,46.355 11.938,46.228 11.938,43.968 ; v1(40.513,56.261) 43.434,56.261 44.958,57.785 46.473,57.785 U1.75@47.382,58.694 ; v1@40.693,56.081 cw(c41.126,55.648) 41.126,56.261 cw(c41.126,56.874) v1@40.693,56.441
  Bottom Layer w0.254: v1@11.684,46.228 13.208,46.228 15.113,48.133 20.193,48.133 25.146,53.086 29.337,53.086 29.718,53.467 34.29,53.467 34.671,53.848 38.1,53.848 v1(40.513,56.261) ; v1@11.737,46.535 ccw(c12.477,47.275) 12.477,46.228 ; v1@40.259,56.261 cw(c39.646,56.261) 40.079,55.827 cw(c40.513,55.394) v1@40.513,56.007
HOSTDP: R163.1 U1.76 | length 54.6
  Top Layer w0.254: R163.1@11.455,41.961 12.446,42.952 12.446,46.736 11.811,47.371 v1(11.557,47.371) cw(c11.557,46.758) 11.991,47.191 ; R163.1@11.455,42.284 ccw(c11.455,43.064) 12.007,42.513 ccw(c12.558,41.961) R163.1@11.778,41.961 ; v1@11.557,47.117 cw(c11.557,45.891) 12.424,46.758 ; v1@40.513,57.15 cw(c40.513,55.924) 41.38,56.791 ; 40.947,57.224 ccw(c40.513,56.791) v1(40.513,57.404) 40.767,57.404 41.402,56.769 43.307,56.769 44.831,58.293 46.274,58.293 U1.76@47.029,59.048
  Bottom Layer w0.254: v1@11.557,47.117 cw(c11.557,46.504) 11.991,46.937 cw(c12.424,47.371) v1@11.811,47.371 ; v1(11.557,47.371) 12.065,46.863 13.081,46.863 14.859,48.641 19.939,48.641 24.892,53.594 29.21,53.594 29.591,53.975 34.036,53.975 34.417,54.356 37.084,54.356 40.132,57.404 v1(40.513,57.404) ccw(c40.513,56.484) 39.863,57.135 ; 39.429,56.701 cw(c40.513,55.617) v1@40.513,57.15
I_ONA: R21.2 U1.18 | length 30.5
  Top Layer w0.254: v1@22.606,45.72 ccw(c22.606,46.899) 23.44,46.065 ; 23.006,45.632 cw(c22.606,46.032) v1(22.606,45.466) 22.84,45.466 U1.18@25.816,48.441
  Bottom Layer w0.254: R21.2@8.768,29.355 ccw(c8.217,29.907) 8.997,29.907 ccw(c9.776,29.907) R21.2@9.225,29.355 ; R21.2@8.997,29.127 8.997,31.603 22.606,45.212 v1(22.606,45.466) cw(c21.993,45.466) 22.426,45.032 ; 21.993,44.599 ccw(c21.126,45.466) v1@22.352,45.466
I_ONB: R22.2 U1.50 | length 36
  Top Layer w0.254: U1.50@40.311,46.674 42.037,44.948 42.037,43.815 v1(42.291,43.561) cw(c42.904,44.174) 42.037,44.174 ; 42.037,44.787 ccw(c43.517,44.787) v1@42.471,43.741
  Bottom Layer w0.254: 24.215,30.014 cw(c23.36,29.16) R22.2@24.569,29.16 ; R22.2@24.644,29.585 ccw(c24.892,29.834) R22.2@24.892,29.483 ; R22.2@24.648,29.581 cw(c24.227,29.16) R22.2@24.823,29.16 ; R22.2@24.892,29.16 24.892,29.337 23.876,30.353 23.876,31.623 30.226,37.973 37.846,37.973 42.545,42.672 42.545,43.307 v1(42.291,43.561) cw(c41.997,43.099) 42.545,43.099 ; v1@42.155,43.347 cw(c41.704,42.636) 42.545,42.636
I_ONC: R23.2 U1.55 | length 25.7
  Top Layer w0.254: U1.55@42.079,48.441 44.45,46.07 v1@44.45,45.339 ; v1@44.143,45.265 ccw(c43.403,46.005) 44.45,46.005
  Bottom Layer w0.254: R23.2@41.19,29.44 ccw(c41.03,29.718) 41.351,29.718 ; R23.2@41.203,29.048 cw(c41.546,29.306) R23.2@41.243,29.61 ; R23.2@41.351,29.16 41.351,29.718 ; R23.2@41.406,29.201 cw(c41.782,29.484) 41.449,29.816 ; R23.2@41.512,29.44 cw(c41.672,29.718) 41.351,29.718 ; R23.2@41.609,29.354 cw(c42.018,29.661) 41.656,30.023 ; v1@44.143,44.905 cw(c43.71,44.472) 44.323,44.472 cw(c44.936,44.472) v1@44.503,44.905 ; v1(44.323,45.085) 44.323,42.418 41.91,40.005 41.91,33.655 41.656,33.401 41.656,30.023 ; 41.351,29.718 41.656,30.023
I_OND: R24.2 U1.68 | length 29.7
  Top Layer w0.254: U1.68@46.675,53.037 48.514,51.199 v1(48.514,50.673) ; v1@48.356,50.872 ccw(c48.097,51.199) 48.514,51.199 ccw(c48.931,51.199) v1@48.672,50.872
  Bottom Layer w0.254: v1(48.514,50.673) 48.895,50.292 50.546,50.292 51.054,49.784 51.054,45.593 50.927,45.466 50.927,35.052 50.546,34.671 50.546,33.02 51.562,32.004 51.562,30.861 52.324,30.099 52.705,30.099 53.34,29.464 R24.2@53.34,29.16 ; 53.007,29.797 cw(c52.369,29.16) R24.2@53.271,29.16
INA_AD: C15.1 J5.1 R17.2 R25.2 R26.1 | length 13.2
  Bottom Layer w0.508: R26.1@8.833,15.907 cw(c8.498,15.572) 8.971,15.572 cw(c9.445,15.572) R26.1@9.11,15.907 ; C15.1@8.836,14.514 cw(c8.508,14.187) 8.971,14.187 ; C15.1@8.836,14.791 ccw(c8.508,15.119) 8.971,15.119 ; 8.971,12.389 ccw(c9.531,12.389) R17.2@9.135,11.994 ; 8.971,12.718 cw(c9.531,12.718) R25.2@9.135,13.114 ; 8.971,13.786 ccw(c9.531,13.786) R25.2@9.135,13.391 ; 8.971,14.172 cw(c9.455,14.172) C15.1@9.113,14.514 ; 8.971,15.133 ccw(c9.455,15.133) C15.1@9.113,14.791 ; R26.1@8.971,16.045 8.971,11.88 R17.2@8.997,11.855 9.746,11.106 J5.1@9.746,9.124 ; R17.2@8.997,11.659 cw(c8.997,11.186) 9.331,11.521 cw(c9.666,11.855) R17.2@9.193,11.855 ; J5.1@9.431,9.539 ccw(c8.669,10.3) 9.746,10.3 ccw(c10.823,10.3) J5.1@10.061,9.539
INA_IO: J5.2 R49.2 R50.1 R57.1 | length 11.9
  Bottom Layer w0.508: R49.2@6.153,4.108 R50.1@7.651,4.108 ; R49.2@6.234,4.304 ccw(c6.707,4.777) 6.707,4.108 ; R57.1@7.507,2.781 ccw(c7.16,3.128) 7.651,3.128 ; R50.1@7.593,4.165 R50.1@7.651,4.108 ; R57.1@7.651,2.647 R50.1@7.651,4.108 ; 7.651,3.103 ccw(c8.106,3.103) R57.1@7.784,2.781 ; R50.1@7.789,3.97 ccw(c8.124,3.635) 7.651,3.635 ccw(c7.177,3.635) 7.512,3.97 ccw(c7.177,3.635) 7.177,4.108 ccw(c7.177,4.581) 7.512,4.247 ccw(c7.177,4.581) 7.651,4.581 ccw(c8.124,4.581) R50.1@7.789,4.247 ; 7.932,5.392 ccw(c6.945,6.38) J5.2@8.31,6.675 ; 8.591,6.051 ccw(c8.028,6.614) J5.2@8.807,6.783 ; J5.2@8.746,6.87 8.746,6.206 7.651,5.111 R50.1@7.651,4.108
INB_AD: C16.1 J6.1 R18.2 R27.2 R28.1 | length 14.4
  Bottom Layer w0.508: J6.1@24.531,9.539 ccw(c23.659,10.411) 24.892,10.411 ; R28.1@24.728,15.914 cw(c24.333,15.518) 24.892,15.518 ; C16.1@24.731,14.496 cw(c24.343,14.108) 24.892,14.108 ; C16.1@24.731,14.773 ccw(c24.343,15.161) 24.892,15.161 ; R18.2@24.753,11.647 cw(c24.419,11.313) 24.892,11.313 cw(c25.365,11.313) R18.2@25.03,11.647 ; R18.2@24.753,11.925 ccw(c24.419,12.259) 24.892,12.259 ccw(c25.365,12.259) R18.2@25.03,11.925 ; R27.2@24.753,13.347 ccw(c24.419,13.682) 24.892,13.682 ccw(c25.365,13.682) R27.2@25.03,13.347 ; J6.1@24.846,9.124 24.892,9.17 R18.2@24.892,11.786 24.892,12.573 R27.2@24.892,13.208 24.892,16.027 R28.1@24.867,16.052 ; 24.892,10.19 ccw(c25.812,10.19) J6.1@25.161,9.539 ; R27.2@24.753,13.07 cw(c24.419,12.735) 24.892,12.735 ; R27.2@24.753,13.07 cw(c24.419,12.735) 24.892,12.735 ; R27.2@24.753,13.07 cw(c24.419,12.735) 24.892,12.735 ; 24.892,12.735 cw(c25.365,12.735) R27.2@25.03,13.07 ; 24.892,12.735 cw(c25.365,12.735) R27.2@25.03,13.07 ; 24.892,12.735 cw(c25.365,12.735) R27.2@25.03,13.07
INB_IO: J6.2 R51.2 R52.1 R58.1 | length 13.3
  Bottom Layer w0.508: R51.2@20.447,4.267 21.895,4.267 R52.1@21.996,4.166 ; R51.2@20.585,4.128 cw(c20.92,3.794) 20.92,4.267 cw(c20.92,4.74) R51.2@20.585,4.406 ; 21.279,4.267 cw(c21.279,3.449) 21.858,4.027 cw(c21.523,3.693) 21.996,3.693 cw(c22.47,3.693) R52.1@22.135,4.027 ; R58.1@21.858,2.781 ccw(c21.523,3.115) 21.996,3.115 ccw(c22.47,3.115) R58.1@22.135,2.781 ; R58.1@21.996,2.642 R52.1@21.996,4.166 ; R52.1@22.191,4.189 cw(c22.838,4.264) 22.377,4.724 23.241,5.588 ; 23.529,5.876 ccw(c23.24,6.166) J6.2@23.53,6.455 ; J6.2@23.846,6.87 23.846,6.193 23.241,5.588 ; R52.1@21.996,4.166 21.996,4.343 23.241,5.588 ; R52.1@22.192,4.166 cw(c23.094,4.166) 22.456,4.803 ccw(c23.094,4.166) R52.1@22.192,4.166
INC_AD: C17.1 J7.1 R19.2 R29.2 R30.1 | length 15.4
  Bottom Layer w0.508: J7.1@40.046,9.124 41.255,9.124 41.757,9.626 R19.2@41.757,10.668 ; J7.1@40.361,8.808 cw(c41.123,8.047) 41.123,9.124 cw(c41.123,10.2) J7.1@40.361,9.439 ; R30.1@41.289,14.898 cw(c40.158,13.767) C17.1@41.757,13.767 ; R30.1@41.427,15.036 R30.1@41.757,14.706 ; R19.2@41.619,10.631 cw(c41.284,10.297) 41.757,10.297 cw(c42.231,10.297) R19.2@41.896,10.631 ; R19.2@41.619,10.909 ccw(c41.284,11.243) 41.757,11.243 ccw(c42.231,11.243) R19.2@41.896,10.909 ; R29.2@41.619,12.054 cw(c41.284,11.719) 41.757,11.719 cw(c42.231,11.719) R29.2@41.896,12.054 ; R29.2@41.619,12.331 ccw(c41.284,12.666) 41.757,12.666 ccw(c42.231,12.666) R29.2@41.896,12.331 ; R19.2@41.757,10.835 41.757,13.208 R30.1@41.757,14.706 ; R29.2@41.757,12.463 cw(c43.195,12.463) C17.1@42.179,13.48 ; C17.1@42.172,13.763 cw(c43.037,14.706) R30.1@41.757,14.706
INC_IO: J7.2 R53.2 R54.1 R59.1 | length 14.6
  Bottom Layer w0.508: R53.2@36.068,4.267 37.516,4.267 R54.1@37.617,4.166 ; R53.2@36.206,4.128 cw(c36.541,3.794) 36.541,4.267 cw(c36.541,4.74) R53.2@36.206,4.406 ; 36.9,4.267 cw(c36.9,3.449) 37.479,4.027 cw(c37.144,3.693) 37.617,3.693 cw(c38.091,3.693) R54.1@37.756,4.027 ; R59.1@37.479,2.882 ccw(c37.144,3.217) 37.617,3.217 ccw(c38.091,3.217) R59.1@37.756,2.882 ; R59.1@37.617,2.744 R54.1@37.617,4.166 ; R54.1@37.813,4.166 cw(c39.021,4.166) 38.167,5.02 ; 38.053,4.906 ccw(c36.634,6.325) J7.2@38.607,6.689 ; 38.736,5.589 ccw(c37.788,6.538) J7.2@39.107,6.781 ; J7.2@38.785,6.408 cw(c38.419,5.899) 39.046,5.899 cw(c39.673,5.899) J7.2@39.307,6.408 ; J7.2@39.046,6.87 39.046,5.899 37.617,4.47 R54.1@37.617,4.166
IND_AD: C18.1 J8.1 R20.2 R31.2 R32.1 | length 16.3
  Bottom Layer w0.508: R32.1@54.09,15.914 cw(c53.749,15.572) 54.232,15.572 ; C18.1@54.093,14.773 ccw(c53.759,15.108) 54.232,15.108 ccw(c54.705,15.108) 54.371,14.773 ccw(c54.705,15.108) 54.705,14.634 ccw(c54.705,14.161) C18.1@54.371,14.496 ; R32.1@54.229,16.052 54.232,16.049 C18.1@54.232,14.634 55.216,14.634 55.575,14.275 R31.2@55.575,13.208 R20.2@55.575,11.786 55.575,9.523 J8.1@55.176,9.124 ; 54.232,15.586 cw(c54.695,15.586) R32.1@54.368,15.914 ; J8.1@54.861,9.539 ccw(c53.136,11.264) 55.575,11.264 ; J8.1@55.22,9.18 ccw(c54.362,10.037) 55.575,10.037 ; R20.2@55.436,11.647 cw(c55.102,11.313) 55.575,11.313 cw(c56.048,11.313) R20.2@55.714,11.647 ; R20.2@55.436,11.925 ccw(c55.102,12.259) 55.575,12.259 ccw(c56.048,12.259) R20.2@55.714,11.925 ; R31.2@55.436,13.07 cw(c55.102,12.735) 55.575,12.735 cw(c56.048,12.735) R31.2@55.714,13.07 ; R31.2@55.436,13.347 ccw(c55.102,13.682) 55.575,13.682 ccw(c56.048,13.682) R31.2@55.714,13.347
IND_IO: J8.2 R55.2 R56.1 R60.1 | length 14.8
  Bottom Layer w0.508: R55.2@51.409,4.267 52.756,4.267 R56.1@52.857,4.166 ; R55.2@51.548,4.128 cw(c51.882,3.794) 51.882,4.267 cw(c51.882,4.74) R55.2@51.548,4.406 ; 52.14,4.267 cw(c52.14,3.449) 52.719,4.027 cw(c52.384,3.693) 52.857,3.693 cw(c53.331,3.693) R56.1@52.996,4.027 ; R56.1@52.545,4.166 cw(c53.447,4.166) 52.809,4.803 ; R60.1@52.719,2.882 ccw(c52.384,3.217) 52.857,3.217 ccw(c53.331,3.217) R60.1@52.996,2.882 ; R56.1@52.719,4.305 ccw(c52.384,4.639) 52.857,4.639 ccw(c53.331,4.639) R56.1@52.996,4.305 ; R60.1@52.857,2.744 R56.1@52.857,4.166 ; R56.1@53.053,4.166 cw(c55.181,4.166) 53.677,5.671 ; 53.157,5.151 ccw(c51.752,6.556) J8.2@53.732,6.731 ; 53.927,5.921 ccw(c53.167,6.681) J8.2@54.238,6.775 ; J8.2@54.176,6.87 54.176,6.17 52.857,4.851 R56.1@52.857,4.166
INTA0: C41.2 R99.2 U1.141 | length 50.4
  Top Layer w0.254: v1@19.378,62.304 cw(c18.638,61.564) 19.685,61.564 ; v1(19.558,62.484) 19.685,62.357 19.685,60.229 U1.141@20.866,59.048
  Bottom Layer w0.254: C41.2@6.201,93.476 6.201,93.113 6.858,92.456 8.382,92.456 9.271,91.567 9.271,89.789 8.382,88.9 8.382,83.947 10.287,82.042 10.287,77.724 11.811,76.2 13.716,76.2 13.97,76.454 17.018,76.454 18.923,74.549 18.923,68.012 19.177,67.758 19.177,62.865 v1(19.558,62.484) ; C41.2@6.266,93.454 ccw(c6.751,93.288) 6.389,92.925 ; C41.2@6.506,93.371 ccw(c7.18,93.141) 6.677,92.637
  Bottom Layer w0.508: C41.2@6.062,93.615 ccw(c5.489,94.188) 6.3,94.188 ; R99.2@6.161,94.756 cw(c5.826,94.421) 6.3,94.421 cw(c6.773,94.421) R99.2@6.438,94.756 ; C41.2@6.3,93.575 R99.2@6.3,94.895
INTB0: C42.2 R100.2 U1.128 | length 41.1
  Top Layer w0.254: v1@22.86,65.786 cw(c22.86,64.675) 23.645,65.461 ; v1(22.86,66.04) 23.066,66.04 U1.128@25.462,63.644
  Bottom Layer w0.254: C42.2@19.104,93.476 19.104,93.164 19.812,92.456 21.336,92.456 22.352,91.44 22.352,80.772 ; C42.2@19.171,93.462 ccw(c19.726,93.344) 19.325,92.943 ; C42.2@19.42,93.409 ccw(c20.272,93.228) 19.656,92.612 ; 22.352,79.883 22.352,80.772 ; v1@22.606,66.04 ccw(c21.993,66.04) 22.426,66.474 ccw(c22.86,66.907) v1@22.86,66.294 ; v1(22.86,66.04) 21.717,67.183 21.717,68.961 21.463,69.215 21.463,74.422 22.352,75.311 22.352,80.772
  Bottom Layer w0.508: C42.2@18.965,93.615 ccw(c18.392,94.188) 19.203,94.188 ; R100.2@19.064,94.756 cw(c18.73,94.421) 19.203,94.421 cw(c19.676,94.421) R100.2@19.341,94.756 ; C42.2@19.203,93.575 R100.2@19.203,94.895
INTC0: C49.2 R117.2 U1.123 | length 36.7
  Top Layer w0.254: v1(26.416,66.675) 26.416,66.226 U1.123@27.23,65.412
  Bottom Layer w0.254: v1@25.844,93.641 ccw(c26.797,94.492) 26.797,93.214 ; v1@26.162,66.929 v1@26.289,66.802 ; 26.162,70.104 26.352,70.294 ; 26.23,93.214 cw(c26.23,93.986) v1(25.654,93.472) 25.912,93.214 26.797,93.214 ; v1(26.416,66.675) v1@26.289,66.802 ; 27.051,93.468 26.797,93.214 ; v1@26.289,66.802 26.035,67.056 26.035,69.977 26.352,70.294 ; 26.352,70.294 26.924,70.866 26.924,80.391 25.781,81.534 25.781,86.487 26.797,87.503 26.797,93.214
  Bottom Layer w0.508: 27.051,93.468 28.063,93.468 28.55,93.955 R117.2@28.55,94.895 ; R117.2@28.411,94.756 cw(c28.077,94.421) 28.55,94.421 cw(c29.023,94.421) R117.2@28.689,94.756
INTD0: C50.2 R118.2 U1.116 | length 49.8
  Top Layer w0.254: v1@29.538,74.369 ccw(c29.105,73.936) 29.105,74.549 ccw(c29.105,75.162) v1@29.538,74.729 ; U1.116@29.705,67.887 28.639,68.953 28.639,70.04 28.067,70.612 28.067,74.295 28.321,74.549 v1(29.718,74.549) ; v1(34.417,88.646) 35.052,89.281 v1(39.624,89.281) ; v1@34.417,88.9 ccw(c34.417,89.513) 34.851,89.08 ccw(c35.284,88.646) v1@34.671,88.646 ; v1@39.444,89.101 ccw(c39.011,88.668) 39.011,89.281 ccw(c39.011,89.894) v1@39.444,89.461
  Bottom Layer w0.254: v1@29.464,74.422 29.464,78.994 31.877,81.407 31.877,86.614 33.909,88.646 ; 29.464,75.162 ccw(c30.331,75.162) v1(29.718,74.549) ; 29.464,75.775 ccw(c30.944,75.775) v1@29.898,74.729 ; 33.116,87.853 cw(c34.417,86.552) v1@34.417,88.392 ; 33.55,88.287 cw(c34.417,87.42) v1(34.417,88.646) ; 33.655,88.392 cw(c33.99,88.057) v1@34.268,88.44 ; 33.865,88.602 cw(c34.167,88.301) v1(34.417,88.646) ; 33.983,88.72 cw(c34.417,88.287) v1@34.417,88.9 ; v1@34.214,88.494 ccw(c33.909,88.265) 33.909,88.646 ; v1@34.214,88.798 cw(c33.909,89.027) 33.909,88.646 ; C50.2@39.297,93.248 cw(c38.746,92.696) 39.526,92.696 cw(c40.305,92.696) C50.2@39.754,93.248 ; v1@39.444,89.461 ccw(c39.248,89.657) 39.526,89.657 ; 39.526,90.132 ccw(c40.475,90.132) v1@39.804,89.461 ; C50.2@39.526,93.476 39.526,89.379 v1(39.624,89.281) ; 33.909,88.646 v1(34.417,88.646)
  Bottom Layer w0.508: R118.2@39.384,94.756 cw(c39.05,94.421) 39.523,94.421 cw(c39.996,94.421) R118.2@39.661,94.756 ; C50.2@39.387,93.615 ccw(c39.059,93.942) 39.523,93.942 ; C50.2@39.523,93.479 R118.2@39.523,94.895 ; 39.523,93.956 ccw(c40.005,93.956) C50.2@39.664,93.615
KEY0: J2.8 U1.2 | length 35.5
  Top Layer w0.254: v1@9.652,35.941 cw(c9.652,35.328) 10.086,35.761 cw(c10.519,36.195) v1@9.906,36.195 ; v1(9.652,36.195) 10.16,35.687 16.002,35.687 16.231,35.916 J2.8@16.231,36.932 ; v1@14.986,43.434 ccw(c14.373,43.434) 14.806,43.868 ccw(c15.24,44.301) v1@15.24,43.688 ; v1(15.24,43.434) 14.478,44.196 14.478,48.417 U1.2@20.159,54.098 ; J2.8@16.144,36.345 cw(c15.934,36.135) 16.231,36.135 cw(c16.528,36.135) J2.8@16.318,36.345
  Bottom Layer w0.254: v1(9.652,36.195) 10.281,36.195 15.24,41.154 v1(15.24,43.434) ; v1@9.832,36.015 cw(c10.265,35.582) 10.265,36.195 cw(c10.265,36.808) v1@9.832,36.375 ; v1@15.06,43.254 cw(c14.627,42.821) 15.24,42.821 cw(c15.853,42.821) v1@15.42,43.254
KEY1: J2.6 U1.3 | length 39.3
  Top Layer w0.254: v1(9.017,35.052) 12.598,35.052 12.827,35.281 16.993,35.281 17.247,35.535 J2.6@17.247,36.424 ; v1@9.197,34.872 cw(c9.63,34.439) 9.63,35.052 cw(c9.63,35.665) v1@9.197,35.232 ; 14.986,45.444 ccw(c15.853,45.444) v1(15.24,44.831) 14.986,45.085 14.986,48.218 U1.3@20.512,53.745 ; 14.986,46.057 ccw(c16.466,46.057) v1@15.42,45.011 ; J2.6@17.16,36.345 cw(c16.95,36.135) 17.247,36.135 cw(c17.544,36.135) J2.6@17.334,36.345
  Bottom Layer w0.254: v1(9.017,35.052) 9.719,35.052 16.129,41.462 16.129,43.942 v1(15.24,44.831) ; v1@9.197,34.872 cw(c9.63,34.439) 9.63,35.052 cw(c9.63,35.665) v1@9.197,35.232 ; v1@15.24,44.577 cw(c15.24,43.964) 15.674,44.397 cw(c16.107,44.831) v1@15.494,44.831
KEY2: J2.4 U1.7 | length 43.8
  Top Layer w0.254: v1@8.562,34.216 ccw(c9.608,35.262) 9.608,33.782 ; 8.995,33.782 cw(c8.995,34.649) v1(8.382,34.036) 8.636,33.782 12.192,33.782 13.208,34.798 18.034,34.798 18.263,35.027 J2.4@18.263,36.424 ; v1@16.129,45.847 cw(c17.785,45.847) 16.614,47.018 ; 16.18,46.584 ccw(c16.917,45.847) v1(15.875,45.847) 15.875,46.279 U1.7@21.927,52.33 ; J2.4@18.176,36.345 cw(c17.966,36.135) 18.263,36.135 cw(c18.56,36.135) J2.4@18.35,36.345
  Bottom Layer w0.254: v1(8.382,34.036) 9.277,34.036 11.433,36.192 ; v1@8.562,33.856 cw(c8.995,33.423) 8.995,34.036 cw(c8.995,34.649) v1@8.562,34.216 ; 11.116,35.874 11.433,36.192 ; v1@15.875,45.593 cw(c15.875,44.98) 16.309,45.413 cw(c16.742,45.847) v1@16.129,45.847 ; v1(15.875,45.847) 16.637,45.085 16.637,41.396 11.433,36.192
KEY3: J2.12 U1.8 | length 20.1
  Top Layer w0.254: 13.947,37.742 cw(c13.637,37.432) J2.12@14.076,37.432 ; J2.12@13.97,37.667 ccw(c14.434,37.667) J2.12@14.106,37.339 ; 13.97,38.28 ccw(c15.047,38.28) J2.12@14.286,37.519 ; J2.12@14.199,36.932 14.199,37.49 13.97,37.719 13.97,40.386 16.002,42.418 16.002,44.831 16.637,45.466 16.637,46.334 U1.8@22.28,51.977
KEY4: J2.11 U1.9 | length 16.5
  Top Layer w0.254: J2.11@14.628,40.066 ccw(c14.489,40.234) 14.707,40.234 ; J2.11@14.707,39.472 14.707,40.234 ; J2.11@14.785,40.066 cw(c14.924,40.234) 14.707,40.234 ; J2.11@14.83,39.972 cw(c15.759,39.972) 15.102,40.629 ; U1.9@22.634,51.623 17.145,46.135 17.145,45.212 16.51,44.577 16.51,42.037 14.707,40.234
KEY5: J2.9 U1.10 | length 15.3
  Top Layer w0.254: J2.9@15.636,40.059 ccw(c15.426,40.269) 15.723,40.269 ccw(c16.02,40.269) J2.9@15.81,40.059 ; J2.9@15.723,39.472 15.723,40.488 17.018,41.783 17.018,44.323 17.653,44.958 17.653,45.935 U1.10@22.987,51.27
LCD_LED: R3.2 U1.73 | length 22.1
  Top Layer w0.254: 48.089,57.41 ccw(c48.615,57.41) v1(48.26,57.023) 48.089,57.194 U1.73@48.089,57.987 ccw(c49.142,57.987) v1@48.431,57.21 ; v1(53.086,44.831) 53.569,45.314 ; v1@53.086,45.085 ccw(c53.086,45.698) 53.52,45.265 ccw(c53.953,44.831) v1@53.34,44.831 ; R3.2@53.879,45.142 ccw(c53.569,44.948) 53.569,45.314 ; R3.2@53.879,45.486 cw(c53.569,45.68) 53.569,45.314 ; R3.2@54.153,45.314 53.569,45.314
  Bottom Layer w0.254: v1@48.26,56.769 cw(c48.26,55.543) 49.127,56.41 ; 48.694,56.843 ccw(c48.26,56.41) v1(48.26,57.023) 48.514,57.023 50.546,54.991 50.546,53.467 52.578,51.435 52.578,45.339 v1(53.086,44.831) ; v1@52.832,44.831 ccw(c52.219,44.831) 52.652,45.265 ccw(c53.086,45.698) v1@53.086,45.085
LCD_RST: LCD1.9 U1.77 | length 35.8
  Top Layer w0.254: U1.77@46.675,59.401 47.472,60.198 49.022,60.198 50.165,59.055 50.165,55.118 51.562,53.721 51.562,48.514 52.451,47.625 v1(54.61,47.625) ; LCD1.9@53.355,39.449 ccw(c53.145,39.659) 53.442,39.659 ccw(c53.739,39.659) LCD1.9@53.529,39.449 ; LCD1.9@53.442,38.862 53.442,40.005 53.442,40.742 53.721,41.021 v1(54.737,41.021) ; v1@54.43,47.445 ccw(c53.997,47.012) 53.997,47.625 ccw(c53.997,48.238) v1@54.43,47.805 ; v1@54.557,40.841 ccw(c54.124,40.408) 54.124,41.021 ccw(c54.124,41.634) v1@54.557,41.201
  Bottom Layer w0.254: v1@54.483,41.021 cw(c55.096,41.021) 54.663,41.455 ; v1@54.585,41.224 ccw(c54.356,41.529) 54.737,41.529 ; v1(54.61,47.625) 54.991,47.244 54.991,45.212 55.626,44.577 55.626,42.418 54.737,41.529 ; v1@54.737,40.767 v1(54.737,41.021) ; v1@54.889,41.224 cw(c55.118,41.529) 54.737,41.529 ; v1@54.991,41.021 cw(c56.831,41.021) 55.53,42.322 ; 55.096,41.888 ccw(c55.963,41.021) v1(54.737,41.021) ; v1(54.737,41.021) 54.737,41.529
LCD_SCK: LCD1.8 R310.2 U1.74 | length 43.6
  Top Layer w0.229: U1.74@47.736,58.341 48.704,59.309 49.149,59.309 49.657,58.801 49.657,54.864 51.054,53.467 51.054,48.133 52.451,46.736 55.626,46.736 v1(55.753,46.609) ; LCD1.8@53.95,36.322 53.95,35.712 54.991,34.671 v1(55.753,34.671) ; LCD1.8@54.085,35.822 ccw(c54.678,35.822) 54.259,35.403 ; 54.803,46.736 cw(c54.803,45.659) v1@55.564,46.42 ; 55.354,46.736 cw(c55.354,46.21) v1@55.726,46.582 ; v1@55.564,34.482 ccw(c55.109,34.027) 55.109,34.671 ccw(c55.109,35.315) v1@55.564,34.86 ; v1@55.69,34.735 v1(55.753,34.671) ; v1@55.753,34.404 cw(c55.753,33.76) 56.208,34.216 cw(c56.664,34.671) v1@56.02,34.671 ; R310.2@57.019,33.552 ccw(c56.692,33.345) 56.692,33.732 ; R310.2@57.019,33.911 cw(c56.692,34.118) 56.692,33.732 ; R310.2@57.303,33.732 56.692,33.732 ; v1(55.753,34.671) 56.692,33.732
  Bottom Layer w0.229: v1@55.564,34.86 ccw(c55.109,35.315) 55.753,35.315 ccw(c56.397,35.315) v1@55.942,34.86 ; 55.626,45.659 cw(c56.703,45.659) v1@55.942,46.42 ; 55.626,46.21 cw(c56.152,46.21) v1@55.78,46.582 ; v1@55.626,46.609 55.626,45.466 56.134,44.958 56.134,42.037 55.753,41.656 ; v1(55.753,34.671) 55.753,37.719 ; 55.753,37.592 55.753,37.719 ; 55.753,41.275 55.753,41.656 ; 55.753,37.719 55.753,41.656
LCD_SDAI: LCD1.5 R311.2 U1.78 | length 51.5
  Top Layer w0.229: U1.78@46.322,59.755 47.273,60.706 49.276,60.706 50.673,59.309 50.673,55.372 52.07,53.975 52.07,52.324 ; 52.07,52.705 52.07,52.324 ; LCD1.5@55.378,39.458 ccw(c55.146,39.69) 55.474,39.69 ccw(c55.801,39.69) LCD1.5@55.57,39.458 ; LCD1.5@55.474,38.862 55.474,39.98 56.261,40.767 v1(56.515,40.767) ; v1@55.486,47.752 ccw(c54.842,47.752) 55.298,48.207 ccw(c55.753,48.663) v1@55.753,48.019 ; 55.626,40.132 cw(c56.515,39.243) v1@56.515,40.5 ; v1(55.753,47.752) 54.991,48.514 52.832,48.514 52.07,49.276 52.07,52.324 ; 56.016,40.522 cw(c56.515,40.024) v1@56.515,40.729 ; R311.2@57.065,31.869 cw(c56.492,31.296) 57.303,31.296 cw(c58.113,31.296) R311.2@57.54,31.869 ; v1@57.088,31.304 ccw(c56.571,31.821) R311.2@57.303,31.821 ; v1(57.277,31.115) 57.303,31.141 R311.2@57.303,32.106 ; R311.2@57.303,31.697 ccw(c57.859,31.697) v1@57.466,31.304
  Bottom Layer w0.229: v1@55.753,47.485 cw(c55.753,46.841) 56.208,47.297 cw(c56.664,47.752) v1@56.02,47.752 ; v1(55.753,47.752) 56.642,46.863 56.642,45.847 ; v1@56.326,40.578 cw(c55.565,39.817) 56.642,39.817 ; v1@56.326,40.956 ccw(c55.565,41.717) 56.642,41.717 ; v1@56.488,40.74 cw(c56.116,40.368) 56.642,40.368 ; v1@56.488,40.794 ccw(c56.116,41.166) 56.642,41.166 ; 56.642,46.101 56.642,45.847 ; v1@57.088,31.304 ccw(c56.633,31.759) 57.277,31.759 ccw(c57.921,31.759) v1@57.466,31.304 ; v1(57.277,31.115) 57.277,38.481 56.642,39.116 56.642,45.847
LCD_SDAO: LCD1.3 U1.79 | length 38.2
  Top Layer w0.229: U1.79@45.968,60.109 46.947,61.087 49.657,61.087 51.181,59.563 51.181,55.626 52.578,54.229 52.578,49.403 52.959,49.022 55.118,49.022 55.499,48.641 56.134,48.641 v1(57.023,47.752) ; LCD1.3@56.49,38.862 56.49,39.599 57.404,40.513 v1(57.658,40.513) ; LCD1.3@56.625,39.362 cw(c57.524,39.362) 56.889,39.998 ; v1@56.756,47.752 ccw(c56.112,47.752) 56.568,48.207 ccw(c57.023,48.663) v1@57.023,48.019 ; 56.769,39.878 cw(c57.658,38.989) v1@57.658,40.246 ; 57.159,40.268 cw(c57.658,39.77) v1@57.658,40.475
  Bottom Layer w0.229: v1@56.834,47.563 cw(c56.073,46.802) 57.15,46.802 ; v1@56.996,47.725 cw(c56.624,47.353) 57.15,47.353 ; v1@57.15,47.625 57.15,42.291 57.404,42.037 57.404,40.767 v1(57.658,40.513) ; 57.404,41.218 ccw(c58.363,41.218) v1@57.685,40.54 ; 57.404,41.77 ccw(c58.915,41.77) v1@57.847,40.702